# EAGLE board Amazing Migelo-Densor (EAGLE 9.7.0)

Size 42.59 x 57.07 mm. Coordinates in mm from the lower left corner, seen from the top.
Outline: 0,0 42.59,0 42.59,57.07 0,57.07 0,0
Copper layers (1*16): Top 0.035mm / dielectric 1.5mm / Bottom 0.035mm
Design rules "default": minimum track width 6mil, minimum drill 0.35mm, track to track 6mil, track to pad 6mil, pad to pad 6mil, via to via 6mil, smd to smd 6mil, copper to edge 40mil, drill to drill 6mil, minimum pad ring 10mil, minimum via ring 8mil, stop-mask expansion 4mil, vias tented up to drill 0mil, thermal gap 10mil

## Footprints (pad centres in the part's own frame; a part is rotated, then mirrored left to right if it is on the bottom)
BAT_3002 = smd 3.96 x 3.96: N 0,0.65 | smd 5.08 x 5.08: P 12.825,0.65; P1 -12.825,0.65
LEDRD254W60D565H860B = drill 0.981 pad 1.581: 1 -1.27,0; 2 1.27,0
RESAD1016W63L850D250B = drill 0.83 pad 1.43: 1 -5.08,0; 2 5.08,0
HA-06-SM065 = drill 1 pad 1.676: 1 -2.54,-2.54; 2 0,2.54; 3 2.54,-2.54

## Placement (x,y rotation side)
BAT1  BR2016  [BAT_3002]  20.19,15.43 0 top
D1  RED  [LEDRD254W60D565H860B]  19.54,49.16 180 top
R1  51  [RESAD1016W63L850D250B]  35.54,29.33 90 top
RPOT1  500  [HA-06-SM065]  35.54,42.03 270 top

## Library data of the parts
BAT1 = Tinkercad; CATEGORY: Battery-Holder; CELL_DIAMETER: 20mm; DESCRIPTION: Battery Retainer Coin, 20.0mm 1 Cell SMD (SMT) Tab; MANUFACTURER: Keystone Electronics; MPN: 3002; PART_STATUS: ACTIVE; ROHS_COMPLIANT: COMPLIANT; SERIES: -; SUB_CATEGORY: Holder; TYPE: Coin Cell
D1 = Tinkercad; CATEGORY: Opto-Electronic; SUB-CATEGORY: LED; VALUE: LED_RED
R1 RPOT1 = Tinkercad

## Nets
BAT1+: BAT1.P BAT1.P1 R1.1
BAT1-: BAT1.N D1.2 RPOT1.1
D1_A: D1.1 RPOT1.2
R1_2: R1.2 RPOT1.3

## Tracks (layer width: path | path; a pad name or v marks a point on that pad's centre or on a via)
BAT1+  (2 unrouted)
BAT1-  (2 unrouted)
D1_A  (1 unrouted)
R1_2  (1 unrouted)